# EAGLE board freeduino_V1.19.2-THbig (EAGLE 7.7.0)
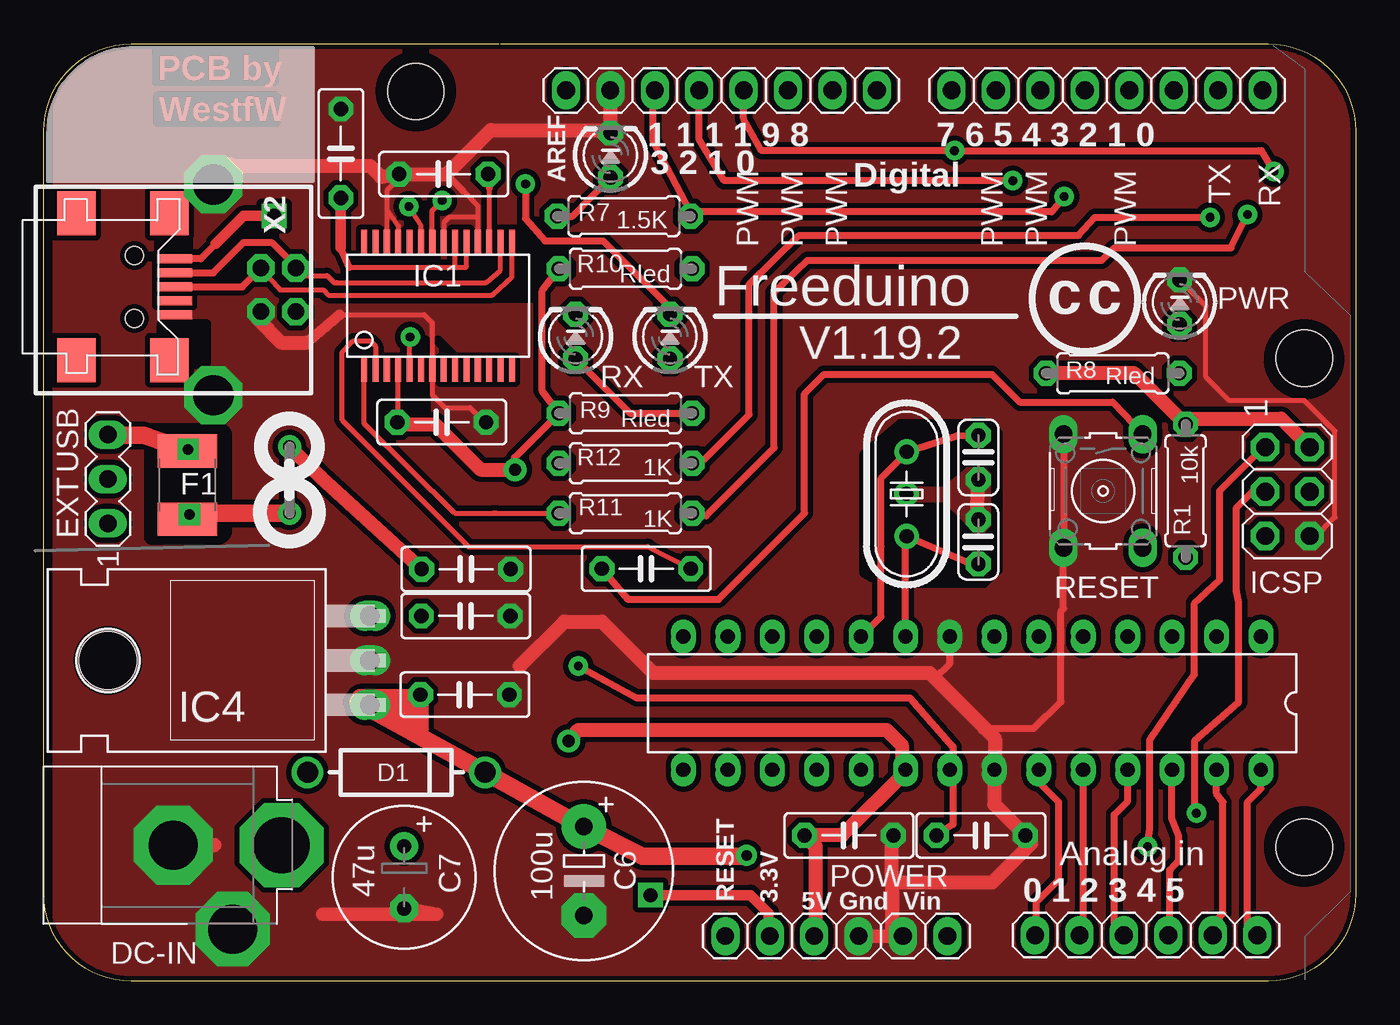
[diagram p0: board, top side]
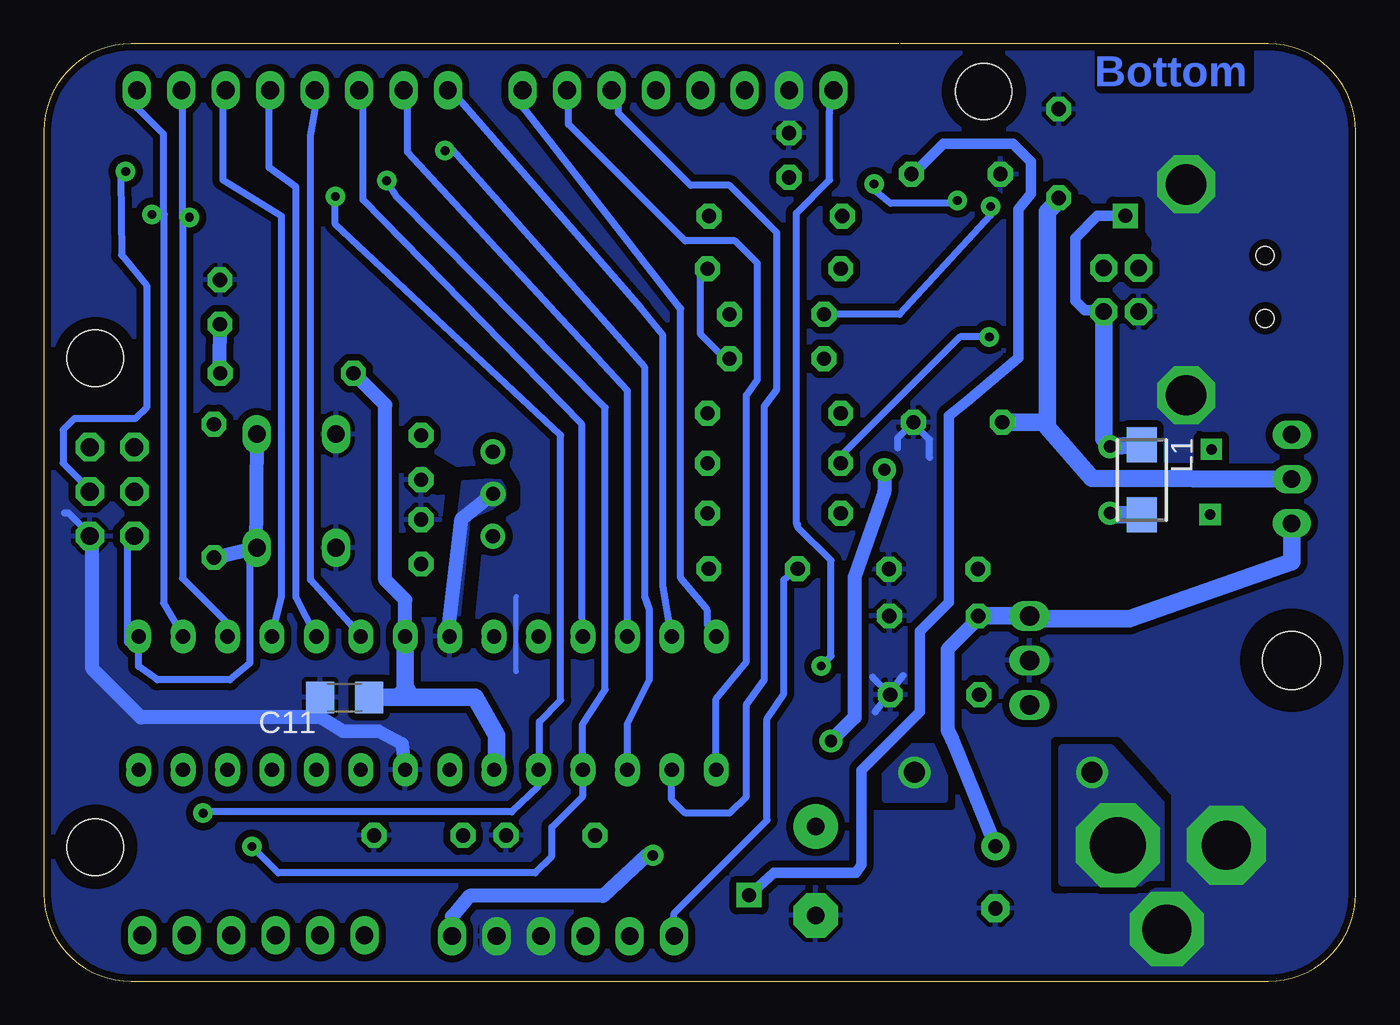
[diagram p1: board, bottom side, seen from below]

Size 75.01 x 53.58 mm. Coordinates in mm from the lower left corner, seen from the top.
Outline: 26.11,53.58 70.01,53.58 arc-90 75.01,48.58 75.01,5 arc-90 70.01,0 5,0 arc-90 0,5 0,48.58 arc-90 5,53.58 26.03,53.58
Copper layers (1*16): Top 0.035mm / dielectric 1.5mm / Bottom 0.035mm
Design rules "default": minimum track width 10mil, minimum drill 0.5mm, track to track 8mil, track to pad 10mil, pad to pad 8mil, via to via 12mil, smd to smd 8mil, copper to edge 10mil, drill to drill 15mil, minimum pad ring 12mil, minimum via ring 12mil, stop-mask expansion 4mil, vias tented up to drill 0.7mm, thermal gap 10mil
Net classes: 0 default: width 0.203 mm, clearance 0.203 mm; 1 power: width 0.3 mm, clearance 0.254 mm; 2 finepitch: width 0.203 mm, clearance 0.203 mm
Holes 3.2 mm at 72.07,35.6 72.07,7.67 21.27,50.84
tRestrict: area 19.4,49 to 23.2,52.8; area 70.2,33.7 to 73.9,37.4; area 70.2,5.8 to 73.9,9.6; 43 lines
bRestrict: area 19.4,49 to 23.2,52.8; area 70.2,33.7 to 73.9,37.4; area 70.2,5.8 to 73.9,9.6; 19 lines

## Footprints (pad centres in the part's own frame; a part is rotated, then mirrored left to right if it is on the bottom)
DIL28-3 = drill 0.813 long: 1 -16.51,-3.81; 2 -13.97,-3.81; 3 -11.43,-3.81; 4 -8.89,-3.81; 5 -6.35,-3.81; 6 -3.81,-3.81; 7 -1.27,-3.81; 8 1.27,-3.81; 9 3.81,-3.81; 10 6.35,-3.81; 11 8.89,-3.81; 12 11.43,-3.81; 13 13.97,-3.81; 14 16.51,-3.81; 15 16.51,3.81; 16 13.97,3.81; 17 11.43,3.81; 18 8.89,3.81; 19 6.35,3.81; 20 3.81,3.81; 21 1.27,3.81; 22 -1.27,3.81; 23 -3.81,3.81; 24 -6.35,3.81; 25 -8.89,3.81; 26 -11.43,3.81; 27 -13.97,3.81; 28 -16.51,3.81
C050-025X075 = drill 0.813 octagon: 1 -2.54,0; 2 2.54,0
C025-024X044 = drill 0.813 octagon: 1 -1.27,0; 2 1.27,0
E5-10,5 = drill 1.016 pad 2.54: + -2.54,0 | drill 1.016 pad 2.54 octagon: - 2.54,0
E3,5-8 = drill 0.813 pad 1.6: + -1.778,0 | drill 0.813 pad 1.6 octagon: - 1.778,0
C1206 = smd 1.6 x 1.8: 1 -1.4,0; 2 1.4,0
DIODE-0.4 = drill 1.2: A 0,0; C 10.16,0
C1812 = smd 1.9 x 3.4: 1 -1.95,0; 2 1.95,0
FB3.8 = drill 0.7: P$1 0,1.9; P$2 0,-1.9
SSOP28DB = smd 0.348 x 1.397: 1 -4.225,-3.656; 2 -3.575,-3.656; 3 -2.925,-3.656; 4 -2.275,-3.656; 5 -1.625,-3.656; 6 -0.975,-3.656; 7 -0.325,-3.656; 8 0.325,-3.656; 9 0.975,-3.656; 10 1.625,-3.656; 11 2.275,-3.656; 12 2.925,-3.656; 13 3.575,-3.656; 14 4.225,-3.656; 15 4.225,3.656; 16 3.575,3.656; 17 2.925,3.656; 18 2.275,3.656; 19 1.625,3.656; 20 0.975,3.656; 21 0.325,3.656; 22 -0.325,3.656; 23 -0.975,3.656; 24 -1.625,3.656; 25 -2.275,3.656; 26 -2.925,3.656; 27 -3.575,3.656; 28 -4.225,3.656
TO220H = drill 1.118 long: 1 -2.54,-10.16; 2 0,-10.16; 3 2.54,-10.16 | hole 3.302: 0,4.826
2X03 = drill 1.016 octagon: 1 -2.54,-1.27; 2 -2.54,1.27; 3 0,-1.27; 4 0,1.27; 5 2.54,-1.27; 6 2.54,1.27
1X08 = drill 1.016 long: 1 -8.89,0; 2 -6.35,0; 3 -3.81,0; 4 -1.27,0; 5 1.27,0; 6 3.81,0; 7 6.35,0; 8 8.89,0
1X06 = drill 1.016 long: 1 -6.35,0; 2 -3.81,0; 3 -1.27,0; 4 1.27,0; 5 3.81,0; 6 6.35,0
SM-B5 = smd 2 x 1.7: 1 -2,0; 2 2,0
LED3MM = drill 0.813 octagon: A -1.27,0; K 1.27,0
HC49U-V = drill 0.813: 1 -2.413,0; 2 2.413,0
0207/7 = drill 0.813 octagon: 1 -3.81,0; 2 3.81,0
B3F-10XX = drill 1.016 long: 1 -3.251,2.261; 2 3.251,2.261; 3 -3.251,-2.261; 4 3.251,-2.261
MA03-1 = drill 1.016 long: 1 -2.54,0; 2 0,0; 3 2.54,0
4UCON-POWER-JACK = drill 2.8 pad 4.25 octagon: 1 -4.8,-3.18 | drill 3.2 pad 4.8 octagon: 2 0,-5.98 | drill 2.8 pad 4.5 octagon: 3 0,0.22
UX60A-MB-5SY = smd 0.5 x 2: 1 -1.6,2.3; 2 -0.8,2.3; 3 0,2.3; 4 0.8,2.3; 5 1.6,2.3 | smd 2.5 x 2.2: C1 -4.2,2; C2 -4.2,-3.3; C3 4.2,-3.3; C4 4.2,2 | hole 1.016: -1.8,0; 1.8,0
USB-WSHIELDPADS = drill 0.95 octagon: 1 1.25,4.71; 2 -1.25,4.71; 3 -1.25,2.71; 4 1.25,2.71 | drill 2.3 octagon: SH1 -6.02,0; SH2 6.02,0

## Placement (x,y rotation side)
BVALUE  ATMEGA168  [DIL28-3]  53.08,15.89 180 top
C1  100n  [C050-025X075]  46.04,8.33 0 top
C2  22pf  [C025-024X044]  53.43,25.11 270 top
C3  22pf  [C025-024X044]  53.43,29.93 90 top
C4  10n  [C050-025X075]  24.15,23.56 180 top
C5  100n  [C050-025X075]  24.08,16.38 180 top
C6  100u  [E5-10,5]  30.88,6.3 270 top
C7  47u  [E3,5-8]  20.61,5.94 270 top
C8  100n  [C050-025X075]  22.86,46.13 180 top
C9  100n  [C050-025X075]  53.58,8.33 0 top
C10  100n  [C050-025X075]  22.75,31.95 180 top
C11  100n  [C1206]  57.81,16.23 0 bottom
C12  100n  [C050-025X075]  24.13,20.88 180 top
C13  4u7  [C050-025X075]  16.99,47.31 270 top
CRS  100n  [C050-025X075]  34.45,23.57 180 top
D1  1N4004  [DIODE-0.4]  15.08,11.93 0 top
F1  PTC1812  [C1812]  8.23,28.36 90 top
FB1  [FB3.8]  14.05,28.65 0 top
IC1  FT232RL  [SSOP28DB]  22.54,38.6 0 top
IC4  7805T  [TO220H]  8.49,18.34 90 top
ICSP  ICSP  [2X03]  71.1,27.98 270 top
J1  [1X08]  38.74,50.92 180 top
J2  [1X06]  63.03,2.63 0 top
J3  [1X08]  60.79,50.92 180 top
JP1  [1X06]  45.32,2.58 0 top
L1  [SM-B5]  12.22,28.65 270 bottom
P13  [LED3MM]  32.4,47.21 90 top
PWR  [LED3MM]  64.93,38.81 90 top
Q1  16Mhz  [HC49U-V]  49.33,27.84 270 top
R1  10k  [0207/7]  65.28,28.03 90 top
R7  1.5K  [0207/7]  33.16,43.73 0 top
R8  Rled  [0207/7]  61.12,34.75 0 top
R9  Rled  [0207/7]  33.26,32.46 0 top
R10  Rled  [0207/7]  33.26,40.72 0 top
R11  1K  [0207/7]  33.26,26.75 0 top
R12  1K  [0207/7]  33.26,29.61 0 top
RESET  [B3F-10XX]  60.56,28.02 270 top
RX  [LED3MM]  30.4,36.85 90 top
SV1  [MA03-1]  3.67,28.7 90 top
TX  [LED3MM]  35.8,36.85 90 top
U$1  DC-IN  [4UCON-POWER-JACK]  7.62,7.78 90 top
U$2  MINIUSB  [UX60A-MB-5SY]  5.18,39.69 270 top
U$3  [CC-LOGO]  60.41,39.61 0 top
X2  [USB-WSHIELDPADS]  9.7,39.52 270 top

## Library data of the parts
BVALUE IC1 U$3 = my-library
C1-C13 CRS R1 R7-R12 = rcl
D1 F1 IC4 = SparkFunEagle-6-6-07
FB1 U$1 X2 = mylib4
ICSP J1-J3 JP1 = pinhead
L1 = inductor-neosid
P13 PWR RX TX = my-led
Q1 = crystal
RESET = switch-omron
SV1 = con-lstb
U$2 = mini-usb

## Nets
+5V [power]: BVALUE.7 BVALUE.20 C1.1 C10.2 C11.2 C13.2 IC1.4 IC1.19 IC1.20 ICSP.2 JP1.3 R1.2 R8.1 R9.1 R10.1 SV1.2
AREF: BVALUE.21 C9.1 J1.8
GND [power]: BVALUE.8 BVALUE.22 C1.2 C2.1 C3.1 C4.1 C5.1 C6.- C7.- C8.2 C9.2 C10.1 C11.1 C12.1 C13.1 IC1.7 IC1.18 IC1.21 IC1.25 IC1.26 IC4.2 ICSP.6 J1.7 JP1.4 JP1.5 P13.K PWR.K RESET.3 RESET.4 U$1.1 U$1.3 U$2.5 X2.4 X2.SH1 X2.SH2
M8RXD [finepitch]: IC1.1 R11.1
M8TXD [finepitch]: IC1.5 R12.1
N$2: BVALUE.15 J1.2
N$3: PWR.A R8.2
N$5 [finepitch]: IC1.23 RX.K
N$6: BVALUE.9 C2.2 Q1.2
N$7 [power]: F1.2 SV1.3
N$8 [power]: D1.A U$1.2
N$9 [finepitch]: IC1.16 U$2.2 X2.2
N$10: BVALUE.4 J3.3
N$11: BVALUE.5 J3.4
N$12: BVALUE.6 J3.5
N$13: BVALUE.11 J3.6
N$14: BVALUE.12 J3.7
N$15: BVALUE.13 J3.8
N$16: BVALUE.23 J2.1
N$17: BVALUE.24 J2.2
N$18: BVALUE.25 J2.3
N$19: BVALUE.26 J2.4
N$20: BVALUE.27 J2.5
N$21: BVALUE.28 J2.6
N$22: BVALUE.3 J3.2 R12.2
N$23: BVALUE.16 J1.3
N$24 [finepitch]: IC1.15 U$2.3 X2.3
N$26: BVALUE.18 ICSP.1 J1.5
N$28: BVALUE.14 J1.1
N$29 [finepitch]: IC1.22 TX.K
N$31: BVALUE.10 C3.2 Q1.1
N$32: P13.A R7.1
N$34: R10.2 TX.A
N$35 [power]: C4.2 F1.1 FB1.P$1 FB1.P$2 L1.1 L1.2 U$2.1 X2.1
N$36: R9.2 RX.A
N$37 [finepitch]: CRS.1 IC1.2
N$43: BVALUE.17 ICSP.4 J1.4
N$44: BVALUE.2 J3.1 R11.2
RESET: BVALUE.1 CRS.2 ICSP.5 JP1.1 R1.1 RESET.1 RESET.2
SCK: BVALUE.19 ICSP.3 J1.6 R7.2
VCC [power]: C7.+ C12.2 IC4.3 SV1.1
VCC3V0 [power]: C8.1 IC1.17 JP1.2
VIN [power]: C5.2 C6.+ D1.C IC4.1 JP1.6

## Tracks (layer width: path | path; a pad name or v marks a point on that pad's centre or on a via)
+5V  (via drill 0.7)
  Top 0.3: IC1.20 23.49,42.29 | IC1.20 | IC1.20 23.52,40.83 23.49,40.8 | 24.13,40.8 24.17,40.84 | 17.46,40.8 23.49,40.8 | 23.49,40.8 24.13,40.8 | 24.17,40.84 IC1.19 | 24.13,40.8 24.17,40.84 | C10.2 20.29,31.95 20.32,31.99 20.27,32.04 IC1.4
  Top 0.4: R10.1 28.5,39.45 28.5,33.73 R9.1 26.91,29.92 26.91,29.91 v26.95,29.23 | 16.99,41.91 17.46,40.8
  Top 0.6: C13.2 | C13.2 16.99,41.91
  Top 0.8: v30,13.73 30,13.65 | 30,13.65 | 30,13.65 30.56,14.37 48.18,14.37 49.05,13.49 49.05,12.14 49.29,12.14 49.29,12.08 | 57.29,34.75 57.31,34.77 | 57.31,34.77 57.31,34.76 R8.1 57.29,34.75 | 57.29,34.75 57.23,34.75 57.23,34.77 | ICSP.2 70.75,32.15 65.33,32.15 65.33,31.88 R1.2 65.28,31.8 | 65.28,31.8 65.33,31.75 | 57.31,34.77 62.31,34.77 65.28,31.8 | v26.95,29.23 24.98,29.23 22.38,31.83 20.4,31.83 20.21,32.02 | 20.21,32.02 20.16,32.07 | C10.2 20.21,32.02 | C1.1 45.64,8.33 49.37,12.06 49.35,12.08 BVALUE.20 49.29,12.08 | C1.1 | C1.1 44.13,7.7 44.13,2.78 44.05,2.69 JP1.3 | 49.29,12.08 49.29,12.06
  Top 1: BVALUE.20 49.2,12.14
  Bottom 0.8: 57.31,34.76 57.31,34.77 | 57.31,34.76 R8.1 57.29,34.75 | 57.31,34.76 R8.1 | BVALUE.7 54.34,21.8 55.48,22.94 55.48,32.94 57.23,34.69 | 57.23,34.69 57.29,34.75 | 57.29,34.75 57.23,34.75 57.23,34.69 | v26.95,29.23 26.95,27.97 28.65,23.1 28.65,15.08 v30,13.73 | C13.2
  Bottom 1: 54.85,16.23 50.36,16.23 49.13,14.05 49.13,12.14 49.19,12.08 BVALUE.20 | 54.85,16.23 C11.2 | 54.85,16.23 54.21,16.59 54.34,16.46 BVALUE.7 | SV1.2 15.08,28.73 17.62,31.67 17.62,32.07 | C13.2 16.91,44.69 17.62,43.97 17.62,32.07 | C13.2 | 17.62,32.07 17.78,32.07 17.66,31.95 C10.2
AREF  (via drill 0.5)
  Top 0.4: v30.56,18.02 33.89,16.19 49.53,16.19 51.99,13.41 51.99,12.49 51.8,12.49 BVALUE.21 51.87,12.14 51.99,12.14 51.99,8.97 C9.1
  Bottom 0.4: J1.8 29.8,50.92 29.92,51.04 | 29.92,51.04 | 29.92,51.04 30.08,49.61 30.08,45.8 31.99,43.89 31.99,26.19 31.91,26.11 31.91,25.96 30,24.05 30,18.57 v30.56,18.02
GND  (via drill 0.8)
  Top 0.3: 24.82,42.29 IC1.18 | 24.82,42.29 24.84,42.29 | C8.2 20.32,45.96 20.24,45.88 20.24,45.8 19.61,45.16 19.61,44.13 | IC1.26 19.62,42.3 19.61,42.31 19.61,44.13 | IC1.25 20.27,43.15 19.61,44.13 | 24.82,43.66 24.82,44.32 23.97,45.16 | 24.82,43.66 24.82,42.29 | IC1.21 22.87,43.35 23.18,43.66 24.82,43.66 | 32.39,48.65 32.56,48.48 | 16.9,38.09 21.74,38.09 21.75,38.1 22.22,37.63 IC1.7 22.22,33.5 22.94,32.78 24.37,32.78 25.32,31.83 25.29,31.8 C10.1 | PWR.K 66.44,38.58 66.44,34.53 66.52,34.45 67.79,33.18 72.07,33.18 73.82,31.43 73.82,26.51 72.63,25.32 72.51,25.44 ICSP.6
  Top 0.4: RESET.3 58.34,31.27 58.34,24.77 RESET.4 58.3,21.31 58.15,21.12 58.15,15.96 56.59,14.45 53.9,14.45 53.82,14.53 53.78,14.49 | 50.96,17.3 | BVALUE.8 51.8,18.15 50.96,17.3 | 23.02,46.12 23.97,45.16
  Top 0.6: 15.04,36.5 16.9,38.09
  Top 0.762: JP1.4 47.2,2.58 48.45,2.58 48.5,2.58 JP1.5 | 15.95,3.83 22.45,3.83 C7.-
  Top 0.8: 32.56,48.48 P13.K | J1.7 32.39,48.65 25.55,48.65 23.02,46.12 20.64,46.12 20.48,45.96 20.47,45.97 C8.2 19.28,45.97 18.65,46.59 10.64,46.59 | 48.5,2.58 | C1.2 48.5,8.33 48.5,5.64 | 48.5,5.64 48.5,2.58 | 48.5,5.64 54.21,5.64 56.44,7.86 56.44,8.02 C9.2 54.34,10.11 BVALUE.22 54.35,12.08 54.37,12.06 54.37,13.89 53.78,14.49 50.96,17.3 50.64,17.62 34.85,17.62 32.07,20.4 | 53.35,26.37 53.37,26.38 C2.1 | 53.35,26.37 C3.1 | 53.35,26.37 53.26,26.27 | 32.07,20.4 31.91,20.56 | U$1.3 9.76,7.78 | 27.23,18.02 29.77,20.56 31.91,20.56 32.07,20.4 | 9.76,45.54 X2.SH1 9.7,45.63 9.68,45.64 | X2.4 12.41,38.05 12.22,37.86 13.58,36.5 15.04,36.5
  Top 1: 9.68,45.64 10.64,46.59
  Bottom 0.3: ICSP.6 72.43,25.44 72.47,25.48 72.39,25.48 | 48,21.99 48,17.7 48.02,17.7
  Bottom 0.4: 24.37,29.92 24.37,30.96 25.32,31.91 26.19,31.04 26.19,30.48 | 26.67,16.43 27.62,17.38 | 26.67,16.43 25.88,17.46 | 27.46,15.4 26.67,16.43 | 72.31,25.48 73.58,26.75 73.82,26.75
  Bottom 0.762: C11.1 59.17,15.08 57.9,14.29 55.88,14.29 54.52,13.56 BVALUE.22
  Bottom 0.8: X2.SH2 9.68,33.42 | v49.32,27.85 51.12,26.43 51.91,19.68 BVALUE.8 | 59.17,15.08 69.45,15.08 72.23,17.86 72.23,25.32 72.39,25.48
  pour Bottom (isolate 0.4, rank 5, no thermals): 4.01,11.66 4.01,-1.17 16.01,-1.17 16.01,11.92 4.03,11.68
  pour Top (isolate 0.4, rank 5, no thermals): 4.82,11.39 4.82,-0.73 17.22,-0.73 17.22,11.39
  pour Bottom (isolate 0.4, no thermals): 45.72,3.81 45.72,0.32 49.69,0.32 49.69,3.81
  pour Bottom (isolate 0.4, no thermals): 33.42,52.31 33.42,49.85 32.99,49.37 31.24,49.37 31.22,51.88 31.91,52.31
  pour Top (isolate 0.305, no thermals): 30.24,54.93 0.64,54.85 0.64,24.84 0.64,-0.71 75.49,-0.79 75.49,54.93
  pour Bottom (isolate 0.406, rank 4): -1.98,54.29 -1.91,-1.19 76.12,-1.19 76.28,54.29
  pour Bottom (isolate 0.4, no thermals): 7.06,47.86 7.06,43.42 12.38,43.42 12.38,47.86
  pour Bottom (isolate 0.4, no thermals): 7.22,35.64 7.22,31.83 11.75,31.83 11.75,35.56 7.46,35.56
M8RXD
  Top 0.3: 25.88,26.75 25.72,26.75 | 25.88,26.75 R11.1 | IC1.1 18.32,31.85 23.49,26.75 25.8,26.75 25.88,26.75
M8TXD  (via drill 0.5)
  Top 0.3: IC1.5 20.92,36.78 v20.95,36.82
  Bottom 0.4: R12.1 29.45,30 22.62,36.83 20.88,36.83 20.89,36.82 v20.95,36.82
N$2
  Bottom 0.4: BVALUE.15 36.56,16.14 34.85,18.26 34.85,33.5 34.21,34.37 34.21,41.04 35.48,42.31 38.34,42.31 45.01,48.97 45.01,50.88 45.04,50.92 J1.2
N$3
  Bottom 0.8: R8.2 64.91,34.81 64.95,35.33 PWR.A
N$5  (via drill 0.5)
  Top 0.3: IC1.23 21.57,43.18 v20.87,44.28
  Bottom 0.3: v20.87,44.28 | v20.87,44.28 21.03,44.12
  Bottom 0.4: v20.87,44.28 20.87,44.21 20.88,43.77 26.08,38.12 RX.K
N$6
  Top 0.4: BVALUE.9 49.26,25.42 49.36,25.43 49.33,25.38 Q1.2 52.73,23.96 C2.2
N$7  (via drill 0.6)
  Top 0.8: F1.2 8.25,30.31 8.25,30.16 v8.25,30.4
  Top 1: F1.2 5.71,31.19 3.81,31.19 SV1.3
N$8
  pour Bottom (isolate 0.61, no thermals): 16.83,13.34 16.83,5.64 11.11,5.64 11.11,10.16 13.97,13.34
N$9
  Top 0.3: IC1.16 26.12,40.64 25.28,39.92 16.75,39.93 16.59,39.93 16.19,40.32 14.85,40.32 X2.2
  Top 0.4: U$2.2 9.69,40.49 11.43,42.23 13.02,42.23 14.45,40.8 X2.2
N$10
  Bottom 0.4: BVALUE.4 61.42,22.01 61.42,43.72 64.75,45.79 64.75,51.02 64.71,51.02 J3.3
N$11
  Bottom 0.4: BVALUE.5 60.58,21.94 60.58,45.39 62.13,46.5 62.13,51.02 62.06,51.09 | 62.06,51.09 62.05,51.1 | 62.06,51.09 J3.4
N$12
  Bottom 0.4: BVALUE.6 57.52,20.46 59.75,22.93 59.75,48.32 59.3,50.92 | 59.3,50.92 59.28,50.94 | 59.3,50.92 J3.5
N$13
  Bottom 0.4: BVALUE.11 44.24,21.03 44.24,31.83 56.75,44.66 56.75,50.88 56.94,50.88 J3.6
N$14
  Bottom 0.4: BVALUE.12 41.64,33.76 54.21,47.39 54.21,50.88 J3.7
N$15
  Bottom 0.4: J3.8 51.71,50.92 40.88,38.5 39.61,36.91 39.61,22.59 BVALUE.13
N$16
  Top 0.4: BVALUE.23 56.88,11.38 58.02,10.24 58.02,5.79 56.75,4.52 56.75,2.62 56.74,2.63 J2.1
N$17
  Top 0.4: J2.2 59.28,2.63 59.29,2.62 59.42,2.75 BVALUE.24
N$18
  Top 0.4: BVALUE.25 61.96,10.29 61.2,9.52 61.2,3.25 61.82,2.63 | 61.82,2.63 61.83,2.62 | J2.3 61.82,2.63
N$19
  Top 0.4: BVALUE.26 64.5,9.26 64.88,8.27 64.88,6.92 64.37,6.35 64.37,2.62 64.36,2.63 J2.4
N$20
  Top 0.4: BVALUE.27 67.04,10.74 67.42,10.24 67.42,3.89 66.91,3.25 66.91,2.62 66.9,2.63 J2.5
N$21
  Top 0.4: BVALUE.28 69.58,11.01 68.82,10.24 68.82,3.25 69.44,2.63 | 69.44,2.63 69.45,2.62 | J2.6 69.44,2.63
N$22  (via drill 0.5)
  Top 0.4: R12.2 37.79,29.85 40.32,32.38 40.32,39.85 43.18,42.62 59.16,42.62 60.09,43.66 v66.67,43.66
  Bottom 0.4: 67.13,50.91 J3.2 67.14,50.89 67.23,50.8 67.07,50.64 67.07,43.66 | BVALUE.3 64.5,20.45 67.07,23.02 67.07,43.66 | 66.99,43.66 67.07,43.66 | v66.67,43.66 66.99,43.66 | 66.99,43.66
N$23
  Bottom 0.4: BVALUE.16 39.1,10.37 38.34,9.6 35.8,9.6 34.85,10.56 34.85,15.8 33.81,17.22 33.81,32.86 33.1,33.81 33.1,42.78 35.8,45.48 38.02,45.48 42.15,49.61 42.15,50.88 42.78,50.88 42.74,50.92 J1.3
N$24
  Top 0.3: IC1.15 26.77,40.26 26.74,40.22 25.7,39.27 25.64,39.21 16.27,39.21 15.97,39.51 13.51,39.51 12.38,40.72 12.35,40.77 X2.3
  Top 0.4: 12.43,40.77 12.46,40.8 | 12.43,40.77 X2.3 | U$2.3 11.35,39.69 12.43,40.77
N$26  (via drill 0.5)
  Top 0.4: ICSP.1 69.73,30.52 67.23,28.02 67.23,22.94 65.79,21.6 65.79,17.53 63.23,13.8 63.23,8.72 v63.1,7.7 | J1.5 37.47,48.11 38.89,45.75 v55.4,45.75
  Bottom 0.4: v55.4,45.75 54.85,44.85 42.91,32.78 42.91,16.67 44.21,14.68 44.21,12.22 44.13,12.14 BVALUE.18 | BVALUE.18 | BVALUE.18 44.18,10.58 45.96,8.81 45.96,7.14 46.91,6.19 61.59,6.19 v63.1,7.7
N$28
  Bottom 0.4: J1.1 47.63,50.02 38.59,38.43 38.59,23.03 37.07,21.19 37.07,20.4 36.81,19.7 BVALUE.14
N$29  (via drill 0.5)
  Top 0.3: IC1.22 22.22,44.04 v22.77,44.61
  Top 0.4: v27.54,45.56 27.54,43.58 28.65,42.31 31.99,42.31 35.8,38.5 TX.K
  Bottom 0.254: 22.89,44.23 v22.77,44.61 22.91,44.43
  Bottom 0.3: 22.85,44.44 v22.77,44.61 22.93,44.52 22.93,44.3
  Bottom 0.4: v22.77,44.61 22.85,44.37 22.86,44.37 22.94,44.45 26.59,44.45 27.54,45.24 v27.54,45.56
N$31
  Top 0.4: C3.2 52.21,31.19 Q1.1 49.33,30.2 49.29,30.16 47.86,28.73 47.86,24.84 47.86,20.84 BVALUE.10
N$32
  Top 0.4: R7.1 30.24,43.73 P13.A
N$34
  Bottom 0.4: R10.2 37.45,40.34 37.45,36.97 36.12,35.64 35.8,35.64 TX.A
N$35  (via drill 0.6, 0.8)
  Top 0.4: 9.84,42.15 8.98,41.29 U$2.1
  Top 0.406: 13.97,30.55 13.97,30.64 | 13.97,30.55 FB1.P$1 | FB1.P$2 13.97,26.75 13.97,30.55
  Top 0.6: 9.84,42.15 11.43,43.74 v13.18,43.74
  Top 0.8: F1.1 8.49,26.41 8.49,26.75 v8.33,26.67 | FB1.P$1 15.84,28.81 C4.2
  Top 1: F1.1 8.31,26.41 8.66,26.75 FB1.P$2
  Bottom 0.4: 14.37,38.27 14.37,38.26 | X2.1 14.37,38.27 | 14.37,38.27 14.45,38.34
  Bottom 0.6: v13.18,43.74 14.76,43.74 16.03,42.47 16.03,38.89 15.48,38.34 14.45,38.34
  Bottom 1: FB1.P$2 13.9,26.83 13.72,26.65 L1.2 | L1.1 13.91,30.57 13.97,30.64 FB1.P$1 14.05,30.64 14.41,31 X2.1
N$36
  Top 0.4: RX.A 33.51,32.46 R9.2
N$37
  Top 0.3: IC1.2 18.97,36.28 18.65,36.59 17.7,36.59 17.07,35.96 17.07,32.07 24.29,24.84 34.53,24.84 CRS.1
N$43  (via drill 0.5)
  Top 0.4: v70.33,46.28 | J1.4 40,50.91 40,49.29 41.04,47.47 51.59,47.47 | v70.33,46.28 69.61,47.47 69.45,47.47 51.59,47.47 | v52.07,47.47 51.59,47.47
  Bottom 0.4: v70.33,46.28 v70.31,46.28 70.6,45.99 70.56,41.51 69.14,39.77 69.14,32.78 69.77,32.15 73.26,32.15 73.9,31.51 73.9,29.61 72.31,28.02 72.34,28.02 ICSP.4 | BVALUE.17 41.64,14.71 40.38,17.22 40.38,21.27 40.64,21.99 40.64,35.08 51.64,47.51 51.64,47.5 v52.07,47.47
N$44  (via drill 0.5)
  Top 0.4: R11.2 37.86,26.59 41.75,30.48 41.75,39.37 43.66,41.2 60.48,41.2 61.2,41.91 67.87,41.91 v68.82,43.81
  Bottom 0.4: BVALUE.2 68.16,21.61 68.16,43.81 | 68.16,43.81 68.16,48.41 69.67,49.91 69.67,50.91 J3.1 | 68.16,43.81 68.1,43.81 | v68.82,43.81 68.16,43.81
RESET
  Top 0.4: CRS.2 33.42,21.83 38.58,21.83 43.5,26.75 43.5,33.58 44.61,34.69 54.21,34.69 55.8,33.1 61.12,33.1 62.86,31.27 62.82,31.31 RESET.1
  Bottom 0.4: ICSP.5 70.2,24.83 70.2,19.33 BVALUE.1 69.58,17.99 68.5,17.22 64.37,17.22 63.23,18.18 63.23,23.92 62.94,24.21 62.94,24.2 RESET.2 62.9,24.25 62.86,24.29 62.9,24.32 | JP1.1 38.97,3.89 33.65,9.21 33.65,15 32.7,16.43 32.7,21.51 32.7,22.94 CRS.2 | R1.1 65.17,24.22 65.16,24.2
  Bottom 0.8: RESET.1 62.9,24.32 | RESET.2 65.16,24.2
SCK  (via drill 0.5)
  Top 0.4: ICSP.3 69.1,27.98 68.18,27.07 68.18,22.3 68.31,21.67 68.31,15.95 65.8,13.73 65.8,9.92 v65.9,9.6 | v58.34,44.85 57.63,43.97 36.99,43.97 34.85,48.02 34.85,50.83 J1.6
  Top 0.8: 36.99,43.97 | R7.2 36.99,43.74 36.99,43.97
  Bottom 0.4: v58.34,44.85 58.34,43.26 45.45,31.19 45.45,16.07 46.67,14.84 46.67,12.07 46.72,12.01 | 46.72,12.01 46.75,11.99 46.75,11.11 48.26,9.68 65.88,9.68 65.9,9.59 | BVALUE.19 46.72,12.01 | 65.9,9.59 65.96,9.52 | 65.9,9.59 v65.9,9.6
VCC
  Bottom 0.8: 18.73,20.72 IC4.3 18.65,20.8 | C7.+ 23.07,13.78 23.34,14.37 23.34,18.97 21.43,20.88 C12.2 | 18.65,20.8 | 18.65,20.8 18.73,20.88
  Bottom 1: SV1.1 3.65,26.14 3.65,23.97 12.94,20.72 18.73,20.72 | 18.73,20.88 C12.2
VCC3V0  (via drill 0.8)
  Top 0.3: 25.47,45.33 IC1.17
  Top 0.4: 25.4,45.88 | C8.1 25.4,45.88 | 25.47,45.33 25.47,45.88 25.4,45.88
  Top 0.6: v34.69,4.92 40.4,4.92 41.43,3.89 41.43,2.7 41.55,2.58 | 41.55,2.58 41.59,2.54 | 41.55,2.58 JP1.2
  Bottom 0.6: C8.1 25.4,46.03 23.57,47.86 19.61,47.86 18.57,46.83 18.57,45.01 19.29,44.13 19.29,35.64 22.27,33.13 23.26,32.31 23.26,21.67 24.92,20 24.92,15.4 28.26,12.06 28.26,6.67 28.57,6.19 33.26,6.19 v34.69,4.92
  Bottom 0.762: C8.1 25.45,45.96
VIN  (via drill 0.6)
  Top 0.8: 40.17,7.2 v40.18,7.19 40.13,7.14
  Top 1: IC4.1 21.51,14.45 21.51,15.56 | 21.51,15.56 21.51,15.87 | 21.51,15.87 | v40.18,7.19 40.16,7.14 34.23,7.14 C6.+ 30.88,8.81 D1.C 17.94,15.95 18.1,15.95 18.1,16.19 21.51,16.19 21.51,16.38 C5.2 21.54,15.98 21.51,15.87 | 21.51,15.56 18.1,15.56
  Bottom 0.8: 51.67,2.62 51.67,2.61 JP1.6 | 51.67,2.7 51.67,2.69 JP1.6 | v40.18,7.19 40.56,7.19 43.04,4.87 50.66,4.87 51.67,3.7 51.67,2.56 JP1.6
  pour Bottom (isolate 0.61, no thermals): 23.5,13.41 26.91,13.41 26.91,10.4 23.5,10.4

## Text on the board
Top: PCB by | WestfW
Bottom: Bottom
tPlace: USB | EXT | RESET | 3.3V | POWER
tNames: AREF | 1 1 1 1 9 8 | 7 6 5 4 3 2 1 0 | TX | RX | 3 2 1 0 | Digital | PWM | PWM | PWM | PWM | PWM | PWM | Freeduino | V1.19.2 | 1 | Analog in | 0 1 2 3 4 5 | 5V Gnd Vin
tDocu: Build-time labels on tValues | Runtime lables on tNames
Edit History: 20071102 WestfW: Neaten schematic, make C placement match sch/brd | 20071028 WestfW: rename THbig. Move left edge ~6mm and adjust | 20071026 WestfW: Add C13 Move LED13 slightly left | 20071025 WestfW: version to 1.18. "pads" on bottom for SMT FB, holes for fuse | 20071025 WestfW: TH regulator only. Add ferrite bead and 10nF USB bypass | 20071017 WestfW: adopt SB dual regulator layout. Bump version to 1.17 | 20071014 WestfW: Reduce via sizes (.5, .7) Add Vreg filter cap. Reduce elongation. | 20071014 WestfW: Change Power Jack package. | 20071014 WestfW: Change R packages to 1/4W, C packages larger (but same pin space.) | 20071014 WestfW: Add values to silkscreen. Change LED package to indicate cathode. | 20071014 WestfW: Move AVR up (50mil) and left (25mil) to clear hole. Rotate reset switch. | 20071012 WestfW: Manual re-route. Bigger pads on bottom. Change text size. Remove C12 | 20071001 WestfW: adjust soldermasks on vias. Manual soldermask on heatsink area. | 20071001 WestfW: Clean up DRC errors (reduce power width in class) | 20070917 WestfW: Move (CC) symbol, use silk_gen to get 5mil widths | 20070917 WestfW: Manual route some, autoroute rest. Fiddle. | 20070917 WestfW: Now V1.16. Change components to TH. | 20070911 WestfW: Now V1.15. Move tracks slightly for shielding | 20070900 Daniel: Schematic and initial placement